# Altium PCB Multivibrator.PcbDoc
Units mm, origin at the board's own origin, x right, y up, seen from the top; angles counter-clockwise.
Board outline 30 x 30 mm, 2 copper layers (Top Layer, Bottom Layer), stack 1.569 mm thick; 9 components, 5 nets, 20 pads, 0 vias.
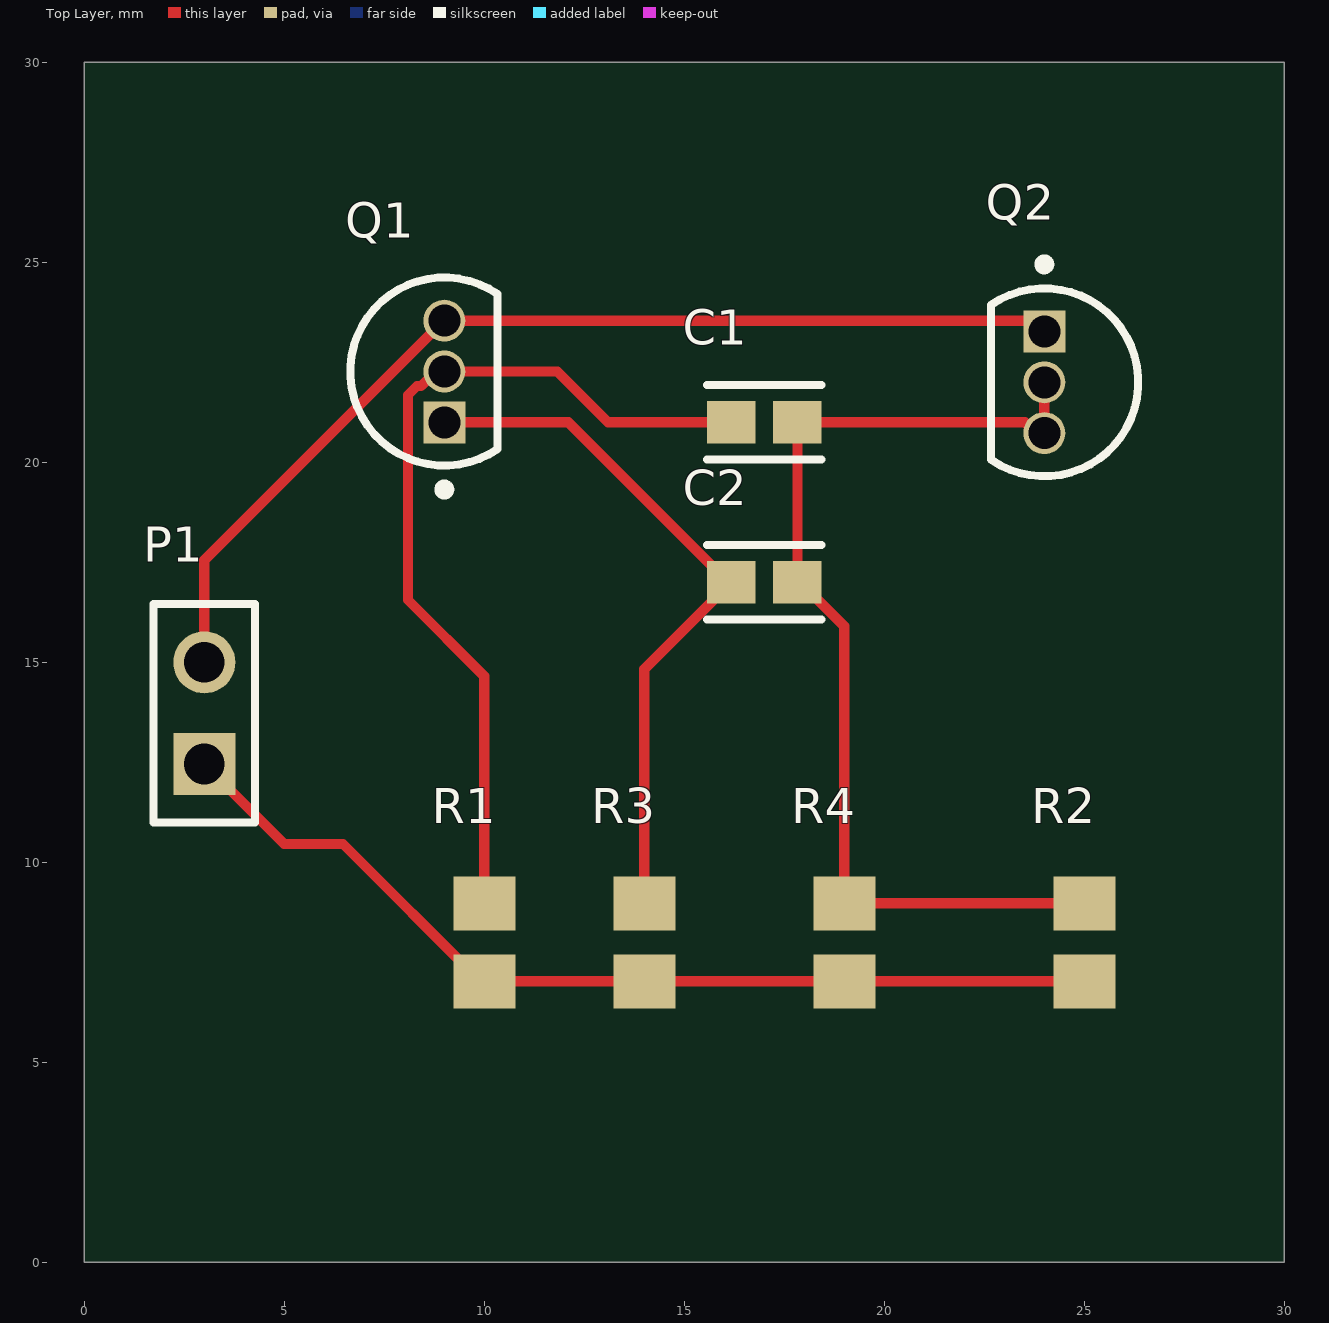
[diagram p0: Top Layer view]
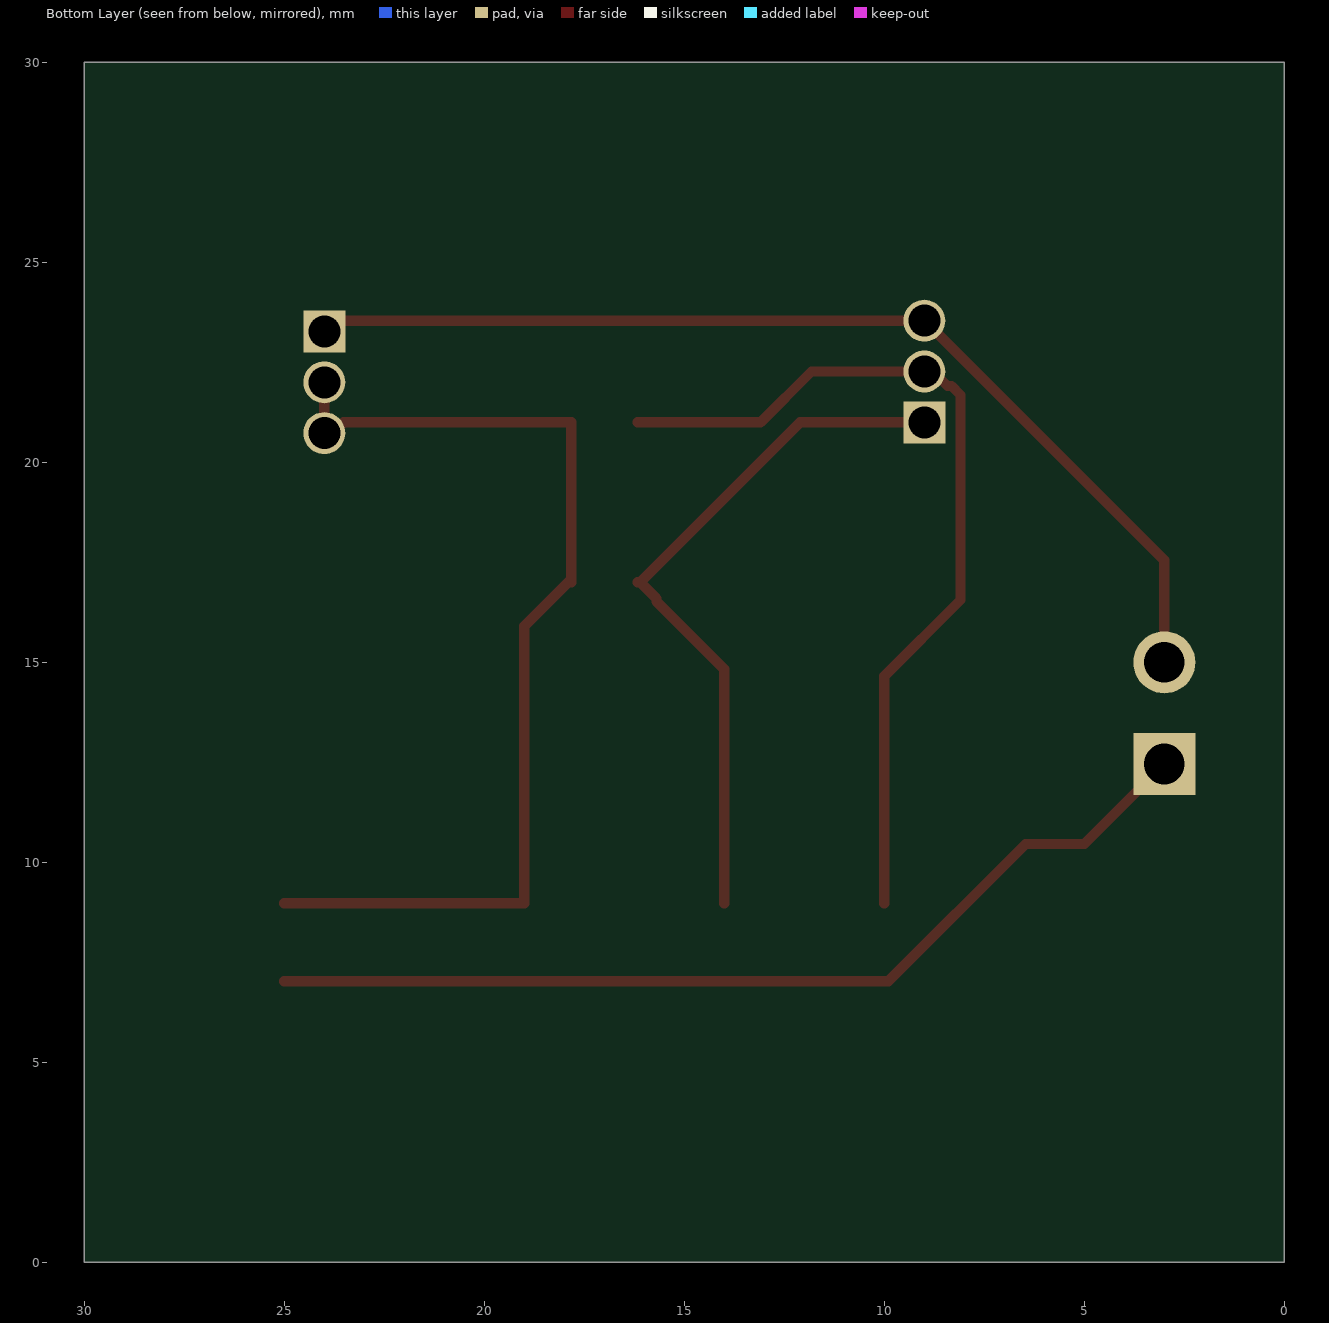
[diagram p1: Bottom Layer view, seen from below]

## Layer stack, top to bottom
Top Solder: solder mask 0.0254, SM-001, Dk 4
Top Layer: signal copper 0.035
Dielectric 1: core 1.4986, Core-043, Dk 4.3
Bottom Layer: signal copper 0.035
Bottom Solder: solder mask 0.0254, SM-001, Dk 4

## Board outline
0,0 30,0 30,30 0,30

## Design rules (kind name [scope] priority, off if disabled: settings)
AssemblyTestPointUsage [All] p1: isadvanced=TRUE
AssemblyTestpoint [All] p1: isadvanced=TRUE testpointundercomponent=TRUE minsize=1.016 maxsize=2.54 preferedsize=1.524 minholesize=0 maxholesize=1.016 preferedholesize=0.813 testpointgrid=0.025 usegrid=TRUE gridtolerance=0 allowsidetop=TRUE allowsidebottom=TRUE
Clearance Clearance_1 [OnMid vs OnMid] p1: gap=0.22 ignorepadtopadclearanceinfootprint=FALSE sourcerule=37 cellrowname=All cellrowtype=0 cellcolname=All cellcoltype=0 innerlayers=TRUE
Clearance Clearance_2 [(ExistsOnLayer('Top Layer') Or ExistsOnLayer('Bottom Layer')) vs (ExistsOnLayer('Top Layer') Or ExistsOnLayer('Bottom Layer'))] p2: gap=0.22 ignorepadtopadclearanceinfootprint=FALSE sourcerule=37 cellrowname=All cellrowtype=0 cellcolname=All cellcoltype=0 outerlayers=TRUE
Clearance [All] p3: gap=0.254 ignorepadtopadclearanceinfootprint=FALSE ismatrix=TRUE
ComponentClearance [All] p1: isadvanced=TRUE gap=0.254 collisioncheckmode=3 verticalgap=0.254 showdistances=FALSE
FabricationTestPointUsage [All] p1: isadvanced=TRUE valid=0 allowmultiple=FALSE
FabricationTestpoint [All] p1: isadvanced=TRUE side=3 testpointundercomponent=TRUE minsize=1.016 maxsize=2.54 preferedsize=1.524 minholesize=0 maxholesize=1.016 preferedholesize=0.813 testpointgrid=0.025 allowsidetop=TRUE allowsidebottom=TRUE usegrid=TRUE gridtolerance=0
FanoutControl Fanout_BGA [IsBGA] p1: isadvanced=TRUE bgadir=Out bgaviamode=Centered fanoutstyle=Auto fanoutdirection=Alternating viagrid=0.025 // Fanout_BGA (Default Rule)
FanoutControl Fanout_LCC [IsLCC] p2: isadvanced=TRUE bgadir=Out bgaviamode=Centered fanoutstyle=Auto fanoutdirection=Alternating viagrid=0.025 // Fanout_LCC (Default Rule)
FanoutControl Fanout_SOIC [IsSOIC] p3: isadvanced=TRUE bgadir=Out bgaviamode=Centered fanoutstyle=Auto fanoutdirection=Alternating viagrid=0.025 // Fanout_SOIC (Default Rule)
FanoutControl Fanout_Small [(CompPinCount < 5)] p4: isadvanced=TRUE bgadir=Out bgaviamode=Centered fanoutstyle=Auto fanoutdirection=OutThenIn viagrid=0.025 // Fanout_Small (Default Rule)
FanoutControl Fanout_Default [All] p5: isadvanced=TRUE bgadir=Out bgaviamode=Centered fanoutstyle=Auto fanoutdirection=Alternating viagrid=0.025 // Fanout_Default (Default Rule)
Height [All] p1: isadvanced=TRUE minheight=0 maxheight=25.4 prefheight=12.7
HoleSize [All] p1: isadvanced=TRUE absolutevalues=TRUE maxlimit=2.54 minlimit=0.025 maxpercent=80.000 minpercent=20.000
HoleToHoleClearance [All] p1: isadvanced=TRUE gap=0.254 allowstackedmicrovias=TRUE
LayerPairs [All] p1: isadvanced=TRUE enforce=TRUE
MinimumSolderMaskSliver [All] p1: isadvanced=TRUE minsoldermaskwidth=0.22
NetAntennae [All] p1: isadvanced=TRUE netantennaetolerance=0
PasteMaskExpansion [All] p1: isadvanced=TRUE expansion=0
PlaneClearance [All] p1: isadvanced=TRUE clearance=0.508
PlaneConnect [All] p1: isadvanced=TRUE planeconnectstyle=Relief reliefexpansion=0.508 reliefentries=4 reliefconductorwidth=0.254 reliefairgap=0.254
PolygonConnect [All] p1: connectstyle=Relief reliefconductorwidth=0.254 reliefentries=4 polygonreliefangle="90 Angle" airgapwidth=0.254
RoutingCorners [All] p1: isadvanced=TRUE cornerstyle=45-Degree minsetback=2.54 maxsetback=2.54
RoutingPriority [All] p1: isadvanced=TRUE routingpriority=0
RoutingVias [All] p1: holewidth=0.711 width=1.27 viastyle="Through Hole" minholewidth=0.711 minwidth=1.27 maxholewidth=0.711 maxwidth=1.27
ShortCircuit [All] p1: isadvanced=TRUE allowed=FALSE
SilkToSilkClearance [All] p1: isadvanced=TRUE silktosilkclearance=0.254
SilkToSolderMaskClearance [IsPad] p1: isadvanced=TRUE minsilkscreentomaskgap=0.254 clearancetoexposedcopper=TRUE
SolderMaskExpansion SolderMaskExpansion_Transistor [HasFootprint('ONSC-TO-92-3-29-11')] p1: isadvanced=TRUE expansion=0 istentingtop=FALSE useseparateexpansions=TRUE expansionbottom=0 istentingbottom=FALSE
SolderMaskExpansion [All] p2: isadvanced=TRUE expansion=0.102 istentingtop=FALSE
UnRoutedNet [All] p1: isadvanced=TRUE
UnpouredPolygon [All] p1: isadvanced=TRUE
Width [All] p1: maxlimit=0.254 minlimit=0.254 preferedwidth=0.254
4 further rules are at their usual default settings.

## Components (designator, comment, footprint, x,y, rotation, side; value= is the part's Value field where it differs from the comment)
C1 "Capacitor 22nF +/-5% 16V 0603" FP-C0603C-CF-IPC_A 17,21 r180 top value=22nF
C2 "Capacitor 22nF +/-5% 16V 0603" FP-C0603C-CF-IPC_A 17,17 r0 top value=22nF
P1 "TSW-102-26-F-S" SMTC-TSW-102-26-XX-S 3,12.46 r90 top
Q1 "BC547CG" ONSC-TO-92-3-29-11 9,22.27 r90 top
Q2 "BC547CG" ONSC-TO-92-3-29-11 24,22 r270 top
R1 "Resistor 100K +/-5% 0805 125 mW" RESC2013X70X40ML20T20 10,8 r270 top value=100k
R2 "Resistor 100K +/-5% 0805 125 mW" RESC2013X70X40ML20T20 25,8 r270 top value=100k
R3 "Resistor 1K +/-5% 0805 500 mW" RESC2013X70X40ML20T20 14,8 r270 top value=1k
R4 "Resistor 1K +/-5% 0805 500 mW" RESC2013X70X40ML20T20 19,8 r270 top value=1k

## Footprints (in the part's own frame and the unit in brackets; to place one, negate y for a bottom-side part, rotate by r counter-clockwise, add the part's x,y. Pads: shape width x height; smd on the part's side, far side on the other; paste and mask are expansions set on the pad)
FP-C0603C-CF-IPC_A [mil]
  rect 47.5x41.66 smd paste+0 mask+0: 1(-32.51,0) 2(32.51,0)
  silkscreen extent -56,-37 56,37, body extent -76,-41 76,41, height 10
ONSC-TO-92-3-29-11 [mm] "TO, 3-Leads, Body Dia 4.7mm, Pitch 1.27mm"
  rect 1.05x1.05 hole 0.8: 1(-1.27,0)
  round 1.05 hole 0.8: 2(0,0) 3(1.27,0)
  silkscreen extent -3.07,-1.34 2.35,2.35, body extent -2.35,-1.33 2.36,2.36, height 7.87
RESC2013X70X40ML20T20 [mm] "Chip Resistor, 2-Leads, Body 2.00x1.25mm, IPC Low Density"
  rect 1.35x1.55 smd: 1(-0.975,0) 2(0.975,0)
  body extent -1.1,-0.72 1.1,0.72, height 0.7
SMTC-TSW-102-26-XX-S [mm] ".025 SQ Post Terminal Strip Assembly, 1x2 Pins, Vertical, 2.54mm Pitch, Male"
  rect 1.55x1.55 hole 1.02: 1(0,0)
  round 1.55 hole 1.02: 2(2.54,0)
  silkscreen extent -1.46,-1.27 4,1.27, body extent -1.4,-1.27 3.81,1.27, height 8.38

## Part data
C1 C2: library part CMP-001-00084-1, "Ceramic Capacitor, Multilayer, Ceramic, 16V, 5% +Tol, 5% -Tol, X7R, 15% TC, 0.022uF, Surface Mount, 0603", Capacitor Type=Ceramic, Case/Package=0603, Max Operating Temperature=125°C, Min Operating Temperature=-55°C, Mounting Technology="Surface Mount", Pins=2, RoHS Compliant=Yes
P1: library part CMP-002-00072-1, "Board Connector, 2 Contact(s), 1 Row(s), Male, Straight, 0.1 inch Pitch, Solder Terminal, Black Insulator", Connector Type="BOARD CONNECTOR", Mounting Technology=Board, RoHS Compliant=Yes
Q1 Q2: library part CMP-013-00034-1, "Small Signal Bipolar Transistor, 0.1A I(C), 45V V(BR)CEO, 1-Element, NPN, Silicon, TO-92", Frequency=300MHz, Max Operating Temperature=150°C, Pins=3, RoHS Compliant=Yes
R1 R2: library part CMP-009-00178-1, "Fixed Resistor, Metal Glaze/thick Film, 0.125W, 100000ohm, 150V, 5% +/-Tol, 200ppm/Cel, Surface Mount, 0805", Case/Package=0805, Max Operating Temperature=155°C, Min Operating Temperature=-55°C, Power=125mW, Tolerance=5%, Mounting Technology="Surface Mount", Pins=2, RoHS Compliant=Yes
R3 R4: library part CMP-009-00179-1, "Fixed Resistor, Metal Glaze/thick Film, 0.125W, 1000ohm, 150V, 5% +/-Tol, 200ppm/Cel, Surface Mount, 0805", Case/Package=0805, Max Operating Temperature=155°C, Min Operating Temperature=-55°C, Power=125mW, Tolerance=5%, Mounting Technology="Surface Mount", Pins=2, RoHS Compliant=Yes

## Nets (pads, with @x,y where several pads share a name; then routed paths per layer and width w, separated by ;. In a path a pad name is that pad's centre, name@x,y a point inside that pad or via, vN(x,y) a via of type N, cw(c..) or ccw(c..) an arc to the next point about the centre after c; other vN are vias at no path point)
12V: P1.1 R1.2 R2.2 R3.2 R4.2 | length 24.3
  Top Layer w0.254: P1.1 5,10.46 6.465,10.46 9.9,7.025 R1.2 R3.2 R4.2 R2.2
GND: P1.2 Q1.3 Q2.1 | length 26.1
  Top Layer w0.254: P1.2 3,17.551 8.989,23.54 Q1.3 23.73,23.54 Q2.1
NetC1_1: C1.1 C2.2 Q2.2 Q2.3 R2.1 R4.1 | length 26
  Top Layer w0.254: C2.2 C1.1 23.515,21 23.785,20.73 Q2.3 Q2.2 ; C2.2@17.9,17 19,15.9 R4.1 R2.1
NetC1_2: C1.2 Q1.2 R1.1 | length 22.3
  Top Layer w0.254: R1.1 10,14.65 8.094,16.556 8.094,21.683 8.317,21.906 8.421,21.906 8.785,22.27 Q1.2 11.822,22.27 13.092,21 C1.2
NetC2_1: C2.1 Q1.1 R3.1 | length 17.7
  Top Layer w0.254: Q1.1 12.1,21 C2.1@16.1,17 ; R3.1 14,14.826 15.698,16.524 15.698,16.598 C2.1@16.1,17 ; C2.1 C2.1@16.1,17